# EAGLE board operator (EAGLE 7.1.0)
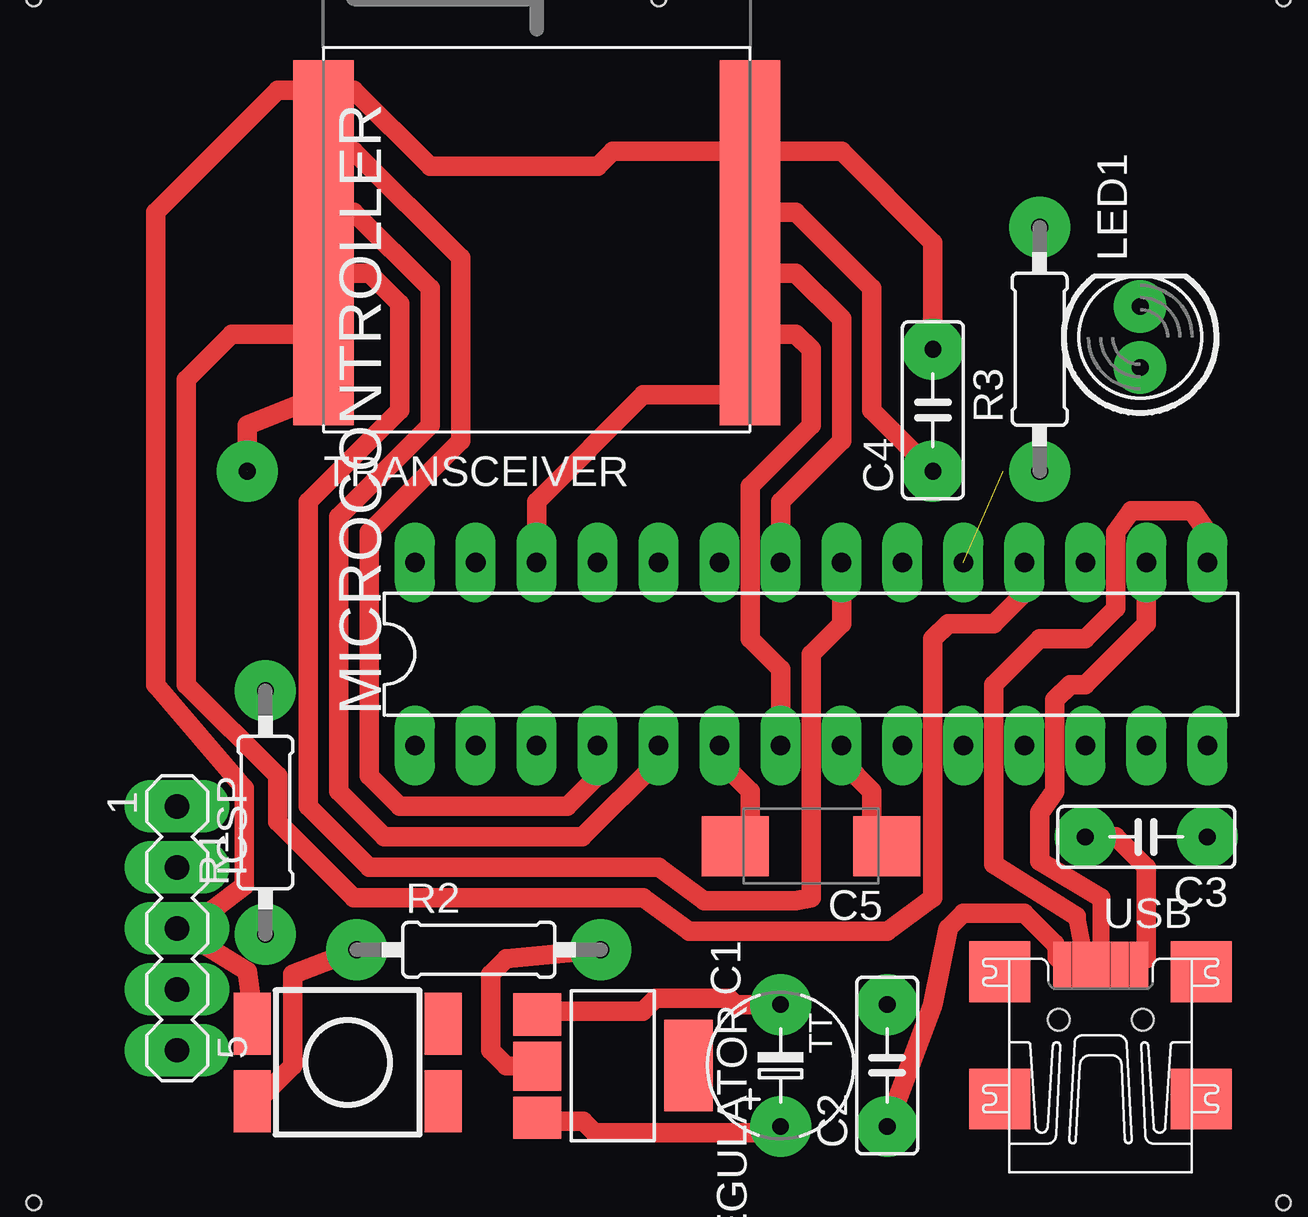
[diagram p0: board, top side]
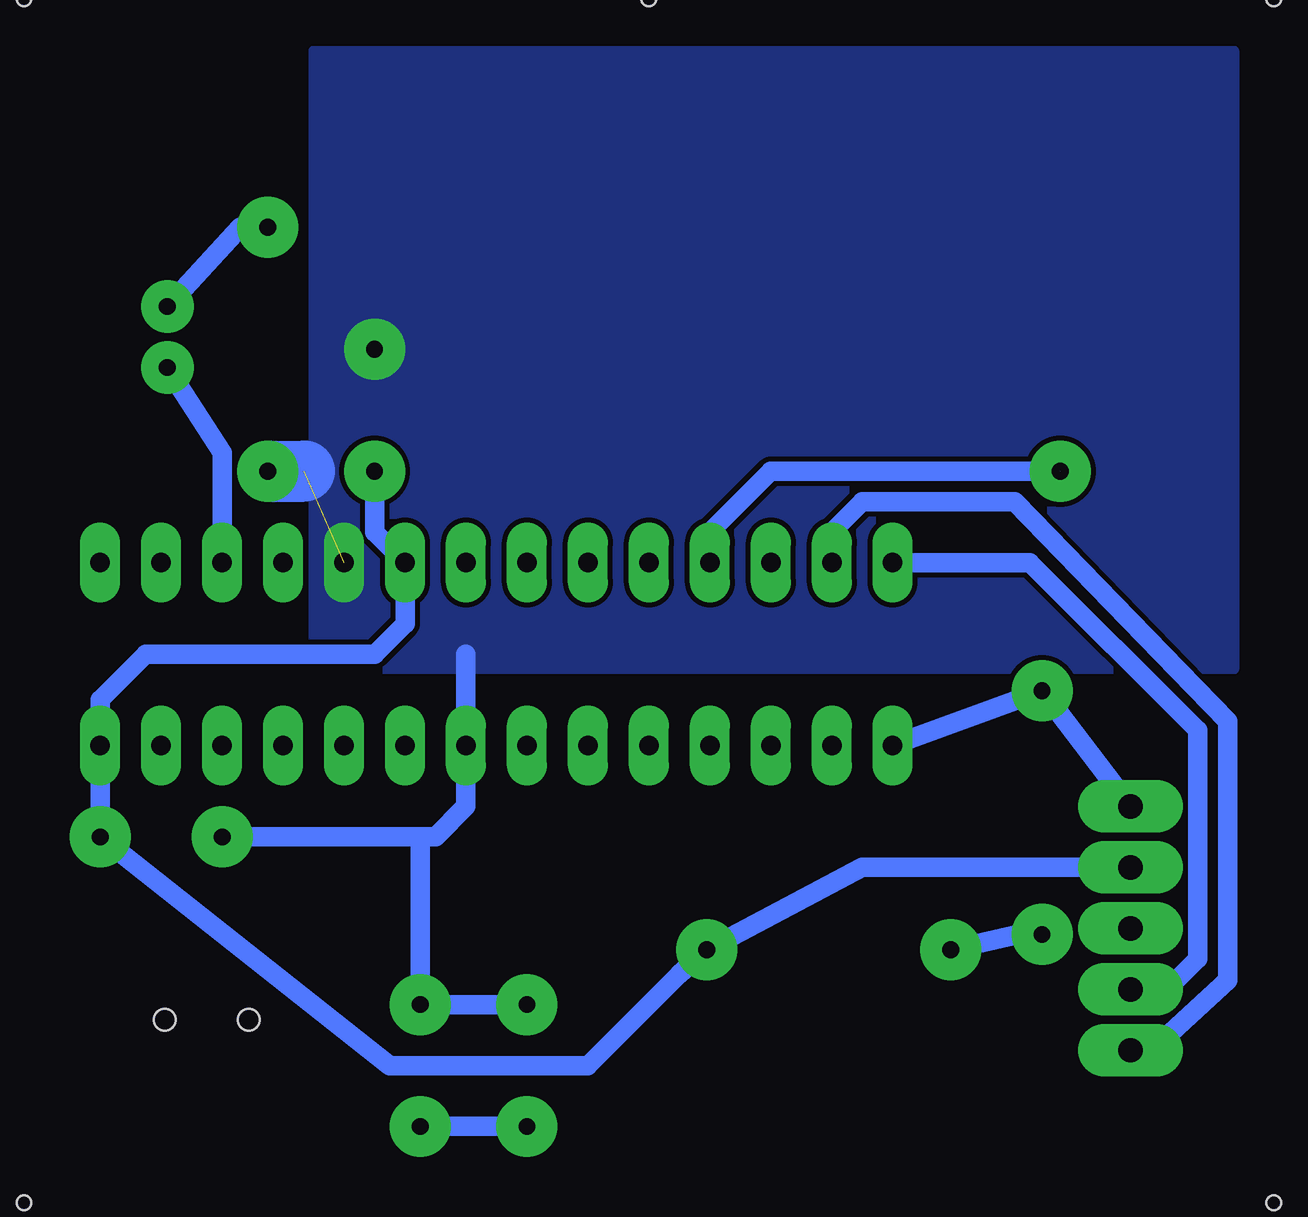
[diagram p1: board, bottom side, seen from below]

No outline drawn. Coordinates in mm, seen from the top.
Copper layers (1*16): Top 0.035mm / dielectric 1.5mm / Bottom 0.035mm
Design rules "default *": minimum track width 10mil, minimum drill 24mil, track to track 8mil, track to pad 8mil, pad to pad 8mil, via to via 8mil, smd to smd 8mil, copper to edge 40mil, drill to drill 8mil, minimum pad ring 10mil, minimum via ring 8mil, stop-mask expansion 4mil, vias tented up to drill 0mil, thermal gap 10mil
Holes 0.6 mm at 0,50.16 0,0 52.07,0 52.07,50.16 26.04,50.16

## Footprints (pad centres in the part's own frame; a part is rotated, then mirrored left to right if it is on the bottom)
TT5D6 = drill 0.7 pad 2.54: + -2.54,0; - 2.54,0
C050-025X075 = drill 0.7 pad 2.54: 1 -2.54,0; 2 2.54,0
C/6032-28R = smd 2.794 x 2.5: + 3.16,0; - -3.16,0
MA05-1 = drill 1.016 pad 2.184 long: 1 -5.08,0; 2 -2.54,0; 3 0,0; 4 2.54,0; 5 5.08,0
LED5MM = drill 0.7 pad 2.184: A -1.27,0; K 1.27,0
DIL28-3 = drill 0.813 pad 1.676 long: 1 -16.51,-3.81; 2 -13.97,-3.81; 3 -11.43,-3.81; 4 -8.89,-3.81; 5 -6.35,-3.81; 6 -3.81,-3.81; 7 -1.27,-3.81; 8 1.27,-3.81; 9 3.81,-3.81; 10 6.35,-3.81; 11 8.89,-3.81; 12 11.43,-3.81; 13 13.97,-3.81; 14 16.51,-3.81; 15 16.51,3.81; 16 13.97,3.81; 17 11.43,3.81; 18 8.89,3.81; 19 6.35,3.81; 20 3.81,3.81; 21 1.27,3.81; 22 -1.27,3.81; 23 -3.81,3.81; 24 -6.35,3.81; 25 -8.89,3.81; 26 -11.43,3.81; 27 -13.97,3.81; 28 -16.51,3.81
0207/10 = drill 0.7 pad 2.54: 1 -5.08,0; 2 5.08,0
SOT223 = smd 1.499 x 2.007: 1 -2.261,-3.15; 2 0.025,-3.15; 3 2.311,-3.15 | smd 3.81 x 2.007: 4 0,3.15 | smd 0.508 x 2.007: 5 -0.741,-3.15; 6 -1.501,-3.15; 7 -1.501,-3.15; 8 -1.501,-3.15; 9 0.799,-3.15; 10 1.559,-3.15
TACTILE_SWITCH_TALL = smd 1.55 x 1.3: A1 -3.975,-2.25; A2 3.975,-2.25; A3 -3.975,-0.98; A4 3.975,-0.98; B1 -3.975,2.25; B2 3.975,2.25; B3 -3.975,0.98; B4 3.975,0.98
MRF89XAMXA = smd 2.515 x 2.515: 1 -8.89,-1.27; 2 -8.89,-3.81; 3 -8.89,-6.35; 4 -8.89,-8.89; 5 -8.89,-11.43; 6 -8.89,-13.97; 7 8.89,-13.97; 8 8.89,-11.43; 9 8.89,-8.89; 10 8.89,-6.35; 11 8.89,-3.81; 12 8.89,-1.27
UX60-MB-5ST = smd 2 x 0.762: 1 2.25,1.6; 2 2.25,0.8; 3 2.25,0; 4 2.25,-0.8; 5 2.25,-1.6 | smd 2.54 x 2.54: M1 -3.3,-4.2; M2 -3.3,4.2; M3 2,4.2; M4 2,-4.2 | hole 0.9: 0,-1.75; 0,1.75

## Placement (x,y rotation side)
C1  10uF  [TT5D6]  31.11,5.71 90 top
C2  0.1uF  [C050-025X075]  35.56,5.71 90 top
C3  0.1uF  [C050-025X075]  46.35,15.24 180 top
C4  0.1uF  [C050-025X075]  37.47,33.02 90 top
C5  10uF  [C/6032-28R]  32.38,14.86 180 top
ICSP  [MA05-1]  5.97,11.43 270 top
LED1  [LED5MM]  46.1,36.07 90 top
MICROCONTROLLER  PIC18F27J53SP  [DIL28-3]  32.38,22.86 0 top
R1  100  [0207/10]  9.65,16.26 90 top
R2  10k  [0207/10]  18.54,10.54 0 top
R3  10k  [0207/10]  41.91,35.56 90 top
REGULATOR  LD33  [SOT223]  24.13,5.71 270 top
RESET  SWITCH-MOMENTARY-2SMD-4  [TACTILE_SWITCH_TALL]  13.08,5.84 180 top
TRANSCEIVER  MRF89XAM8A  [MRF89XAMXA]  20.95,47.62 0 top
USB  mini_usb_connector  [UX60-MB-5ST]  44.45,7.62 90 top

## Library data of the parts
C1 C5 = resistor
C2-C4 = rcl
ICSP = con-lstb; OC_FARNELL: unknown; OC_NEWARK: unknown
LED1 = SparkFun-LED
MICROCONTROLLER = microchip; MPN: PIC18F27J53-I/SP; OC_FARNELL: unknown; OC_NEWARK: 63R7839
R1-R3 = resistor; SPICEPREFIX: R
REGULATOR = burr-brown; MPN: LD33; OC_FARNELL: 1097566; OC_NEWARK: 14P6981
RESET = SparkFun-Electromechanical; PROD_ID: SWCH-11966
TRANSCEIVER = microchip2
USB = con-hirose; OC_FARNELL: unknown; OC_NEWARK: unknown

## Nets
5V: C1.+ C2.1 REGULATOR.3 USB.1
GND: C1.- C2.2 C3.2 C4.2 C5.- ICSP.3 MICROCONTROLLER.8 MICROCONTROLLER.19 R3.1 REGULATOR.1 RESET.A2 TRANSCEIVER.1 TRANSCEIVER.11 TRANSCEIVER.12 USB.5
N$1: MICROCONTROLLER.15 USB.2
N$2: MICROCONTROLLER.16 USB.3
N$3: ICSP.1 MICROCONTROLLER.1 R1.2
N$4: C5.+ MICROCONTROLLER.6
N$5: R1.1 R2.1 RESET.B2
N$6: ICSP.4 MICROCONTROLLER.28
N$7: ICSP.5 MICROCONTROLLER.27
N$8: MICROCONTROLLER.21 TRANSCEIVER.4
N$9: MICROCONTROLLER.26 TRANSCEIVER.7
N$10: MICROCONTROLLER.25 TRANSCEIVER.6
N$11: MICROCONTROLLER.5 TRANSCEIVER.3
N$12: MICROCONTROLLER.7 TRANSCEIVER.8
N$13: MICROCONTROLLER.4 TRANSCEIVER.2
N$14: LED1.K R3.2
N$15: LED1.A MICROCONTROLLER.17
N$16: MICROCONTROLLER.22 TRANSCEIVER.9
N$17: MICROCONTROLLER.18 TRANSCEIVER.5
VCC: C3.1 C4.1 ICSP.2 MICROCONTROLLER.14 MICROCONTROLLER.20 R2.2 REGULATOR.2 TRANSCEIVER.10

## Tracks (layer width: path | path; a pad name or v marks a point on that pad's centre or on a via)
5V
  Top 0.61: 42.55,10.79 42.55,10.18 USB.1
  Top 0.813: REGULATOR.3 22.89,3.4 23.37,2.92 30.23,2.92 C1.+ | C2.1 37.47,8.26 38.1,11.43 38.73,12.06 41.27,12.06 42.55,10.79
  Bottom 0.813: C1.+ C2.1
GND  (1 unrouted)
  Top 0.61: 46.34,10.16 USB.5
  Top 0.813: TRANSCEIVER.12 TRANSCEIVER.11 | TRANSCEIVER.11 24.13,43.81 23.5,43.18 16.51,43.18 13.34,46.35 TRANSCEIVER.1 10.16,46.35 5.08,41.27 5.08,21.59 8.76,17.27 8.76,13.21 7.11,11.94 ICSP.3 8.89,9.65 RESET.A2 | MICROCONTROLLER.8 33.66,18.41 34.92,17.14 34.92,14.62 C5.- | REGULATOR.1 25.38,7.98 25.91,8.51 28.96,8.51 29.21,8.26 C1.- | C3.2 45.09,15.24 46.35,13.97 46.35,10.16 46.34,10.16 | TRANSCEIVER.11 33.66,43.81 37.47,40.01 C4.2
  Bottom 0.813: 33.66,22.86 MICROCONTROLLER.8 33.66,16.51 34.92,15.24 35.56,15.24 | 35.56,15.24 C3.2 | C1.- C2.2 35.56,15.24
  Bottom 2.54: R3.1 40.39,30.48
  pour Bottom (isolate 0.025, no thermals): 1.65,48.01 1.65,22.23 40.01,22.23 40.01,48.01
N$1
  Top 0.7: 43.43,11.94 43.69,10.67 USB.2
  Top 0.813: MICROCONTROLLER.15 48.9,27.94 48.26,28.83 45.72,28.83 45.09,27.94 45.09,24.77 43.81,23.5 41.91,23.5 40.01,21.59 40.01,14.1 43.43,11.94
N$2
  Top 0.7: 44.45,12.7 USB.3
  Top 0.813: MICROCONTROLLER.16 46.35,24.13 43.81,21.59 43.18,21.59 42.55,20.95 42.55,17.14 41.91,16.26 41.91,14.22 44.45,12.7
N$3
  Bottom 0.813: MICROCONTROLLER.1 R1.2 ICSP.1
N$4
  Top 0.813: MICROCONTROLLER.6 28.57,18.41 29.84,17.14 29.84,14.62 C5.+
N$5
  Top 0.813: RESET.B2 8.85,3.77 10.79,5.71 10.79,9.53 R2.1
  Bottom 0.813: R1.1 9.53,11.43 R2.1
N$6
  Bottom 0.813: MICROCONTROLLER.28 10.16,26.67 3.17,19.68 3.17,10.16 4.45,8.89 ICSP.4
N$7
  Bottom 0.813: ICSP.5 5.08,6.35 1.91,9.27 1.91,20.07 10.79,29.21 17.14,29.21 18.41,27.94 MICROCONTROLLER.27
N$8
  Top 0.813: TRANSCEIVER.4 13.97,38.73 15.24,37.47 15.24,33.02 11.43,29.21 11.43,16.51 13.97,13.97 26.04,13.97 27.94,12.57 31.75,12.57 32.38,12.7 32.38,22.86 33.66,24.13 MICROCONTROLLER.21
N$9
  Top 0.813: TRANSCEIVER.7 25.4,33.66 20.95,29.21 MICROCONTROLLER.26
N$10  (1 unrouted)
  Top 0.813: TRANSCEIVER.6 8.89,32.38 8.89,30.48
  Bottom 0.813: MICROCONTROLLER.25 23.5,27.94 20.95,30.48 8.89,30.48
N$11
  Top 0.813: TRANSCEIVER.3 13.34,41.27 16.51,38.1 16.51,32.38 12.7,28.57 12.7,17.14 14.61,15.24 22.86,15.24 26.04,18.41 MICROCONTROLLER.5
N$12
  Top 0.813: TRANSCEIVER.8 31.75,36.2 32.38,35.56 32.38,32.38 29.84,29.84 29.84,23.5 31.11,22.23 MICROCONTROLLER.7
N$13
  Top 0: 13.97,26.04 13.97,27.94
  Top 0.813: TRANSCEIVER.2 13.34,43.81 17.78,39.37 17.78,31.75 13.97,27.94 13.97,17.78 15.24,16.51 22.23,16.51 23.5,17.78 MICROCONTROLLER.4
N$14
  Bottom 0.813: R3.2 43.05,40.64 LED1.K
N$15
  Bottom 0.813: MICROCONTROLLER.17 43.81,31.24 LED1.A
N$16
  Top 0.813: TRANSCEIVER.9 31.75,38.73 33.66,36.83 33.66,31.75 31.11,29.21 MICROCONTROLLER.22
N$17
  Top 0.813: TRANSCEIVER.5 8.26,36.2 6.35,34.29 6.35,21.59 10.16,17.78 10.16,15.88 13.34,12.7 25.4,12.7 27.3,11.3 35.56,11.3 37.47,12.7 37.47,23.5 38.1,24.13 40.01,24.13 41.27,25.4 MICROCONTROLLER.18
N$19  (via drill 0.7 pad 2.54)
  other vias: 8.89,30.48
VCC
  Top 0.813: TRANSCEIVER.10 31.75,41.27 34.92,38.1 34.92,33.02 C4.1 | R2.2 19.68,10.16 19.05,9.53 19.05,6.35 19.68,5.71 REGULATOR.2
  Bottom 0.813: C4.1 37.47,27.94 MICROCONTROLLER.20 36.2,24.13 37.47,22.86 46.99,22.86 48.9,20.95 MICROCONTROLLER.14 C3.1 36.83,5.71 28.57,5.71 24.77,9.53 R2.2 17.14,13.97 ICSP.2